# Altium PCB example2.PcbDoc
Units mil, origin at the board's own origin, x right, y up, seen from the top; angles counter-clockwise.
Board outline 2155 x 3085 mil, 2 copper layers (Top Layer, Bottom Layer); 42 components, 35 nets, 110 pads, 1 vias.
Unrouted connection lines stored in the file: 65.
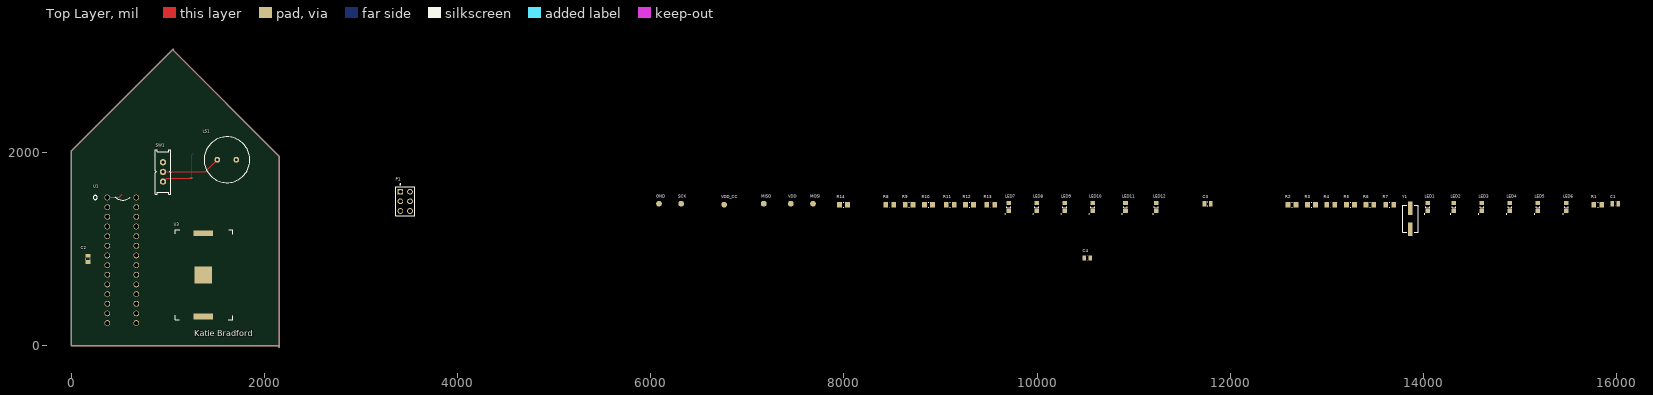
[diagram p0: Top Layer view]
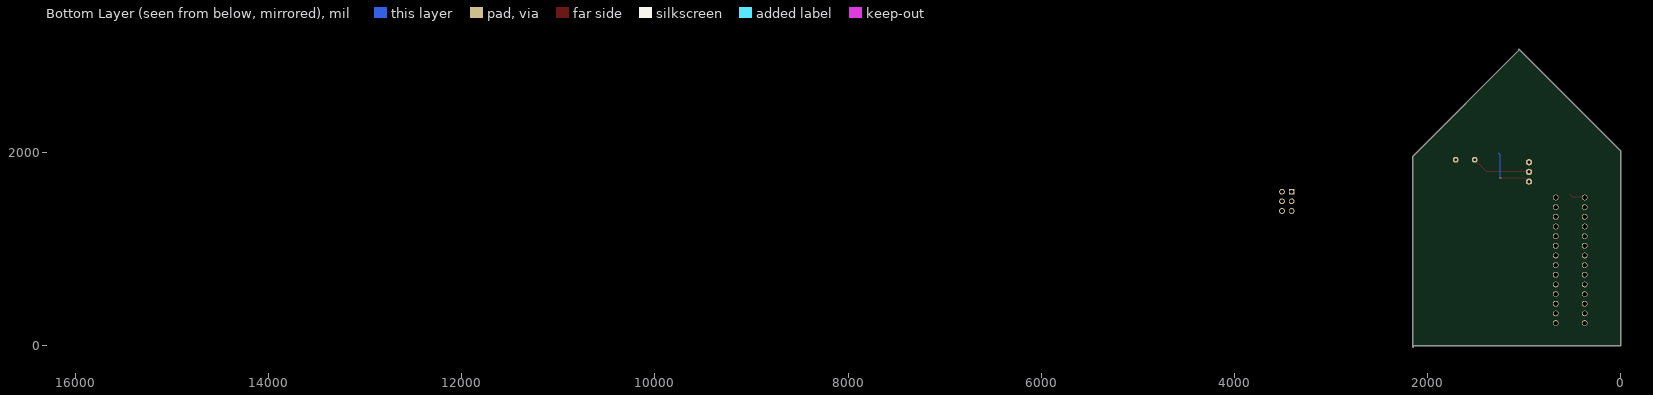
[diagram p1: Bottom Layer view, seen from below]

## Layer stack, top to bottom
Top Solder: solder mask 0.4, Solder Resist, Dk 3.5
Top Layer: signal copper 1.4
Dielectric 1: dielectric 12.6, FR-4, Dk 4.8
Bottom Layer: signal copper 1.4
Bottom Solder: solder mask 0.4, Solder Resist, Dk 3.5

## Board outline
0,0 2140,0 2155,-15 2155,1960 1055,3060 1055,3070 0,2015

## Design rules (kind name [scope] priority, off if disabled: settings)
Clearance [All] p1: gap=10 ignorepadtopadclearanceinfootprint=FALSE except(0: Arc-Hole Track-Hole SMDPad-Hole THPad-Hole Via-Hole Fill-Hole Poly-Hole Region-Hole Text-Hole)
PolygonConnect [All] p1: connectstyle=Relief reliefconductorwidth=10 reliefentries=4 polygonreliefangle="90 Angle" airgapwidth=10
RoutingVias [All] p1: holewidth=28 width=50 viastyle="Through Hole" minholewidth=28 minwidth=50 maxholewidth=28 maxwidth=50
SolderMaskExpansion [All] p1: expansion=4 istentingtop=FALSE
Width [All] p1: maxlimit=10 minlimit=10 preferedwidth=10
30 further rules are at their usual default settings.

## Components (designator, comment, footprint, x,y, rotation, side; value= is the part's Value field where it differs from the comment)
C1 ".1uF" CAPC0805(2012)145_L 15985,1470 r0 top
C2 ".1uF" CAPC0805(2012)145_L 174.21,898.62 r90 top
C3 "33pF" CAPC0805(2012)145_L 11765,1470 r0 top
C4 "33pF" CAPC0805(2012)145_L 10519.68,908.46 r0 top
GND "TP" TP 6085,1470 r90 top
LED1 "Red" LED_0805 14045,1435 r90 top
LED2 "Red" LED_0805 14315,1435 r90 top
LED3 "Red" LED_0805 14605,1435 r90 top
LED4 "Red" LED_0805 14895,1435 r90 top
LED5 "Red" LED_0805 15185,1435 r90 top
LED6 "Red" LED_0805 15480,1435 r90 top
LED7 "Red" LED_0805 9705,1435 r90 top
LED8 "Red" LED_0805 9995,1435 r90 top
LED9 "Red" LED_0805 10285,1435 r90 top
LED10 "Red" LED_0805 10575,1435 r90 top
LED11 "Red" LED_0805 10915,1435 r90 top
LED12 "Red" LED_0805 11235,1435 r90 top
LS1 "Piezo" Piezo 1512.8,1925.2 r0 top
MISO "TP" TP 7170,1470 r90 top
MOSI "TP" TP 7680,1470 r90 top
P1 "CN-2P-M-R6" HRWN-M20-9980346_V 3492.87,1529.68 r0 top
R1 "1K" RESC0805(2012)_M 15805,1460 r0 top
R2 "330R" RESC0805(2012)_M 12640,1460 r0 top
R3 "330R" RESC0805(2012)_M 12840,1460 r0 top
R4 "330R" RESC0805(2012)_M 13040,1460 r0 top
R5 "330R" RESC0805(2012)_M 13245,1460 r0 top
R6 "330R" RESC0805(2012)_M 13445,1460 r0 top
R7 "330R" RESC0805(2012)_M 13650,1460 r0 top
R8 "330R" RESC0805(2012)_M 8475,1460 r0 top
R9 "330R" RESC0805(2012)_M 8675,1460 r0 top
R10 "330R" RESC0805(2012)_M 8875,1460 r0 top
R11 "330R" RESC0805(2012)_M 9100,1460 r0 top
R12 "330R" RESC0805(2012)_M 9300,1460 r0 top
R13 "330R" RESC0805(2012)_M 9520,1460 r0 top
R14 "10K" RESC0805(2012)_M 7995,1460 r0 top
SCK "TP" TP 6315,1470 r90 top
SW1 "SPDT" EG1218_EG1218 950.79,1799.21 r90 top
U1 "ATMEGA328P" 1-2199298-9 764.02,794.45 r90 top
U3 "Coin Cell" Batt 1367.13,733.27 r90 top
VDD "TP" TP 7450,1470 r90 top
VDD_CC "TP" TP 6760,1460 r90 top
Y1 "ECS-160-20-3X-TR" XTAL_ECS-160-20-3X-TR 13865,1315 r90 top

## Footprints (in the part's own frame and the unit in brackets; to place one, negate y for a bottom-side part, rotate by r counter-clockwise, add the part's x,y. Pads: shape width x height; smd on the part's side, far side on the other; paste and mask are expansions set on the pad)
1-2199298-9 [mm] "CONN IC DIP SOCKET 28POS TIN"
  round 1.5 hole 1.2: 1(18.796,9.906) 2(16.256,9.906) 3(13.716,9.906) 4(11.176,9.906) 5(8.636,9.906) 6(6.096,9.906) 7(3.556,9.906) 8(1.016,9.906) 9(-1.524,9.906) 10(-4.064,9.906) 11(-6.604,9.906) 12(-9.144,9.906) 13(-11.684,9.906) 14(-14.224,9.906) 15(-14.224,2.286) 16(-11.684,2.286) 17(-9.144,2.286) 18(-6.604,2.286) 19(-4.064,2.286) 20(-1.524,2.286) 21(1.016,2.286) 22(3.556,2.286) 23(6.096,2.286) 24(8.636,2.286) 25(11.176,2.286) 26(13.716,2.286) 27(16.256,2.286) 28(18.796,2.286)
  silkscreen extent 18.12,3.81 19.33,13.62, body extent -15.49,0.97 20.07,10.97, height 5
Batt [mm] "Coin Cell"
  rect 4.5x4.5 smd: GND(0,0)
  rect 1.5x5.1 smd: VDD(-10.95,0) VDD(10.95,0)
  silkscreen extent -11.81,-7.75 11.81,7.37, body extent -11.81,-7.75 11.81,7.37, height 0.25
CAPC0805(2012)145_L [mm] "Chip Capacitor, Body 2.0x1.2mm, Height 1.45mm, IPC High Density"
  rect 0.95x1.35 smd: 1(-0.8,0) 2(0.8,0)
  silkscreen extent -0.05,-0.58 0.05,0.58, body extent -1.1,-0.72 1.1,0.72, height 1.45
EG1218_EG1218 [mil]
  round 66 hole 35.43: 1(-100,0) 2(0,0) 3(100,0)
  silkscreen extent -230,-80 230,80, body extent -228,-79 228,79, height 303
HRWN-M20-9980346_V [mm] "THD, 6-Leads, Body 7.62x5.08mm, Pitch 2.54mm"
  rect 1.5x1.5 hole 1: 1(-2.159,1.651)
  round 1.5 hole 1: 2(0.381,1.651) 3(-2.159,-0.889) 4(0.381,-0.889) 5(-2.159,-3.429) 6(0.381,-3.429)
  silkscreen extent -3.43,-4.7 1.65,3.7, body extent -3.43,-4.7 1.65,2.92, height 8.12
LED_0805 [mm] "Chip LED, 2-Leads, Body 2.0x1.3mm, IPC Medium Density"
  rect 1.1x1.2 smd: 1(-1.05,0) 2(1.05,0)
  silkscreen extent -1.83,-0.5 0.15,0.94, body extent -1,-0.62 1,0.63, height 0.68
Piezo [mil]
  round 60 hole 27.56: 1(0,0) 2(196.85,0)
  silkscreen extent -137,-237 337,237, body extent -140,-240 340,240, height 256
RESC0805(2012)_M [mm] "Chip Resistor, Body 2.0x1.3mm, IPC Low Density"
  rect 1.25x1.5 smd: 1(-1.05,0) 2(1.05,0)
  silkscreen extent -0.05,-0.65 0.05,0.65, body extent -1.1,-0.67 1.1,0.67, height 0.7
TP [mm] "3mm SM Test Point"
  round 1.5 smd: 1(0,0)
XTAL_ECS-160-20-3X-TR [mm]
  rect 3.5x1.2 smd: 1(-2.75,0) 2(2.75,0)
  silkscreen extent -3.5,-2.05 3.5,2.05

## Part data
C1 C2: library part CAP100n, "capacitor", Manufacturer=Yageo, MPN=CC0805ZRY5V9BB104
C3 C4: library part CAP33p, "CAP CER 33PF 50V C0G/NPO 0805", Manufacturer=Yageo, MPN=CC0805JRNPO9BN330
GND MISO MOSI SCK VDD VDD_CC: library part TestPoint, "Test Point", Manufacturer=N/A, MPN=N/A
LED1 LED2 LED3 LED4 LED5 LED6 LED7 LED8 LED9 LED10 LED11 LED12: library part LED_0805, "Red 625nm LED Indication - Discrete 2V 0805 (2012 Metric)", Manufacturer="Würth Elektronik", MPN=150080RS75000
LS1: "AUDIO PIEZO TRANSDUCER 30V TH", Manufacturer="TDK Corporation", MPN=PS1240P02BT
R1: library part RES, "RES SMD 1K OHM 5% 1/8W 0805", Manufacturer=Yageo, MPN=RC0805JR-071KL
R2 R3 R4 R5 R6 R7 R8 R9 R10 R11 R12 R13: library part RES, "RES SMD 330 OHM 5% 1/8W 0805", Manufacturer=Yageo, MPN=RC0805JR07330RL
R14: library part RES10K, "RES SMD 10K OHM 5% 1/8W 0805", Manufacturer=Yageo, MPN=RC0603JR-0710KL
SW1: library part SPDT_Switch, "Slide Switch SPDT Through Hole", Manufacturer=E-Switch, MPN=EG1218
U1: library part ATMEGA328P-PU, "AVR AVR® ATmega Microcontroller IC 8-Bit 20MHz 32KB (16K x 16) FLASH 28-PDIP", Manufacturer="Microchip Technology", MPN=ATMEGA328P-PU
U3: library part Batt, "Battery Retainer Coin, 20.0mm 1 Cell SMD (SMT) Tab", Manufacturer="Keystone Electronics", MPN=3034TR
Y1: "16MHz Â±30ppm Crystal 20pF 50 Ohms HC-49/US", Package="HC49/US ECS International", Digi-Key_Part_Number=XC1776CT-ND, Digi-Key_Purchase_URL=https://www.digikey.com/product-detail/en/ecs-inc/ECS-160-20-3X-TR/XC1776CT-ND/2676640?utm_source=snapeda&utm_medium=aggregator&utm_campaign=symbol, MF="ECS Inc.", MP=ECS-160-20-3X-TR, SnapEDA_Link=https://www.snapeda.com/parts/ECS-160-20-3X-TR/ECS%20Inc./view-part/561589/?ref=snap

## Via types
v1: diameter 20, hole 12, Top Layer to Bottom Layer, tented both sides, 1 vias

## Nets (pads, with @x,y where several pads share a name; then routed paths per layer and width w, separated by ;. In a path a pad name is that pad's centre, name@x,y a point inside that pad or via, vN(x,y) a via of type N, cw(c..) or ccw(c..) an arc to the next point about the centre after c; other vN are vias at no path point)
GND: C1.1 C2.1 C3.1 C4.1 GND.1 P1.6 SW1.3 U1.8 U1.22 U3.GND
LED1: R2.2 U1.4
LED2: R3.2 U1.5
LED3: R4.2 U1.6
LED4: R5.2 U1.13
LED5: R6.2 U1.12
LED6: R7.2 U1.11
LED7: R8.2 U1.23
LED8: R9.2 U1.24
LED9: R10.2 U1.25
LED10: R11.2 U1.26
LED11: R12.2 U1.27
LED12: R13.2 U1.28
MISO: MISO.1 P1.1 U1.18
MOSI: MOSI.1 P1.4 U1.17
NetC3_2: C3.2 U1.9 Y1.2
NetC4_2: C4.2 U1.10 Y1.1
NetLED1_1: LED1.1 R2.1
NetLED2_1: LED2.1 R3.1
NetLED3_1: LED3.1 R4.1
NetLED4_1: LED4.1 R5.1
NetLED5_1: LED5.1 R6.1
NetLED6_1: LED6.1 R7.1
NetLED7_1: LED7.1 R8.1
NetLED8_1: LED8.1 R9.1
NetLED9_1: LED9.1 R10.1
NetLED10_1: LED10.1 R11.1
NetLED11_1: LED11.1 R12.1
NetLED12_1: LED12.1 R13.1
NetLS1_2: LS1.2 R1.2
Piezo: R1.1 U1.15
RESET: P1.5 R14.2 U1.1 | length 167.9
  Top Layer w10: U1.1 496.26,1534.45 528.54,1566.73
SCK: P1.3 SCK.1 U1.19
VDD: C1.2 C2.2 LED1.2 LED2.2 LED3.2 LED4.2 LED5.2 LED6.2 LED7.2 LED8.2 LED9.2 LED10.2 LED11.2 LED12.2 LS1.1 P1.2 R14.1 SW1.2 U1.7 U1.20 VDD.1 | length 614.2
  Top Layer w10: SW1.2 1386.81,1799.21 LS1.1
VDD_CC: SW1.1 U3.VDD VDD_CC.1 | length 577.2
  Top Layer w10: SW1.1 987.8,1736.22 v1(1247.05,1736.22)
  Bottom Layer w10: v1(1247.05,1736.22) 1247.05,1975.39 1265.75,1994.09
pads on no net: U1.2 U1.3 U1.14 U1.16 U1.21

## Polygon pours and split planes (outlines as drawn)
GND on Top Layer "NONET_L01_P000" (solid, remove dead copper, shelved, pour order 0): 0,0 2140,0 2155,-15 2155,1960 1055,3060 1055,3070 0,2015

## Silkscreen, mask and mechanical layers (free items; w line width, h text height)
Top Overlay:
  text "Katie Bradford" at 1275.75,100.55 h60
Mechanical 1:
  the board outline again, w10